# Altium PCB mainboard.PcbDoc
Units mil, origin at the board's own origin, x right, y up, seen from the top; angles counter-clockwise.
Board outline 2960 x 2965 mil, 2 copper layers (Top Layer, Bottom Layer); 49 components, 42 nets, 204 pads, 127 vias.
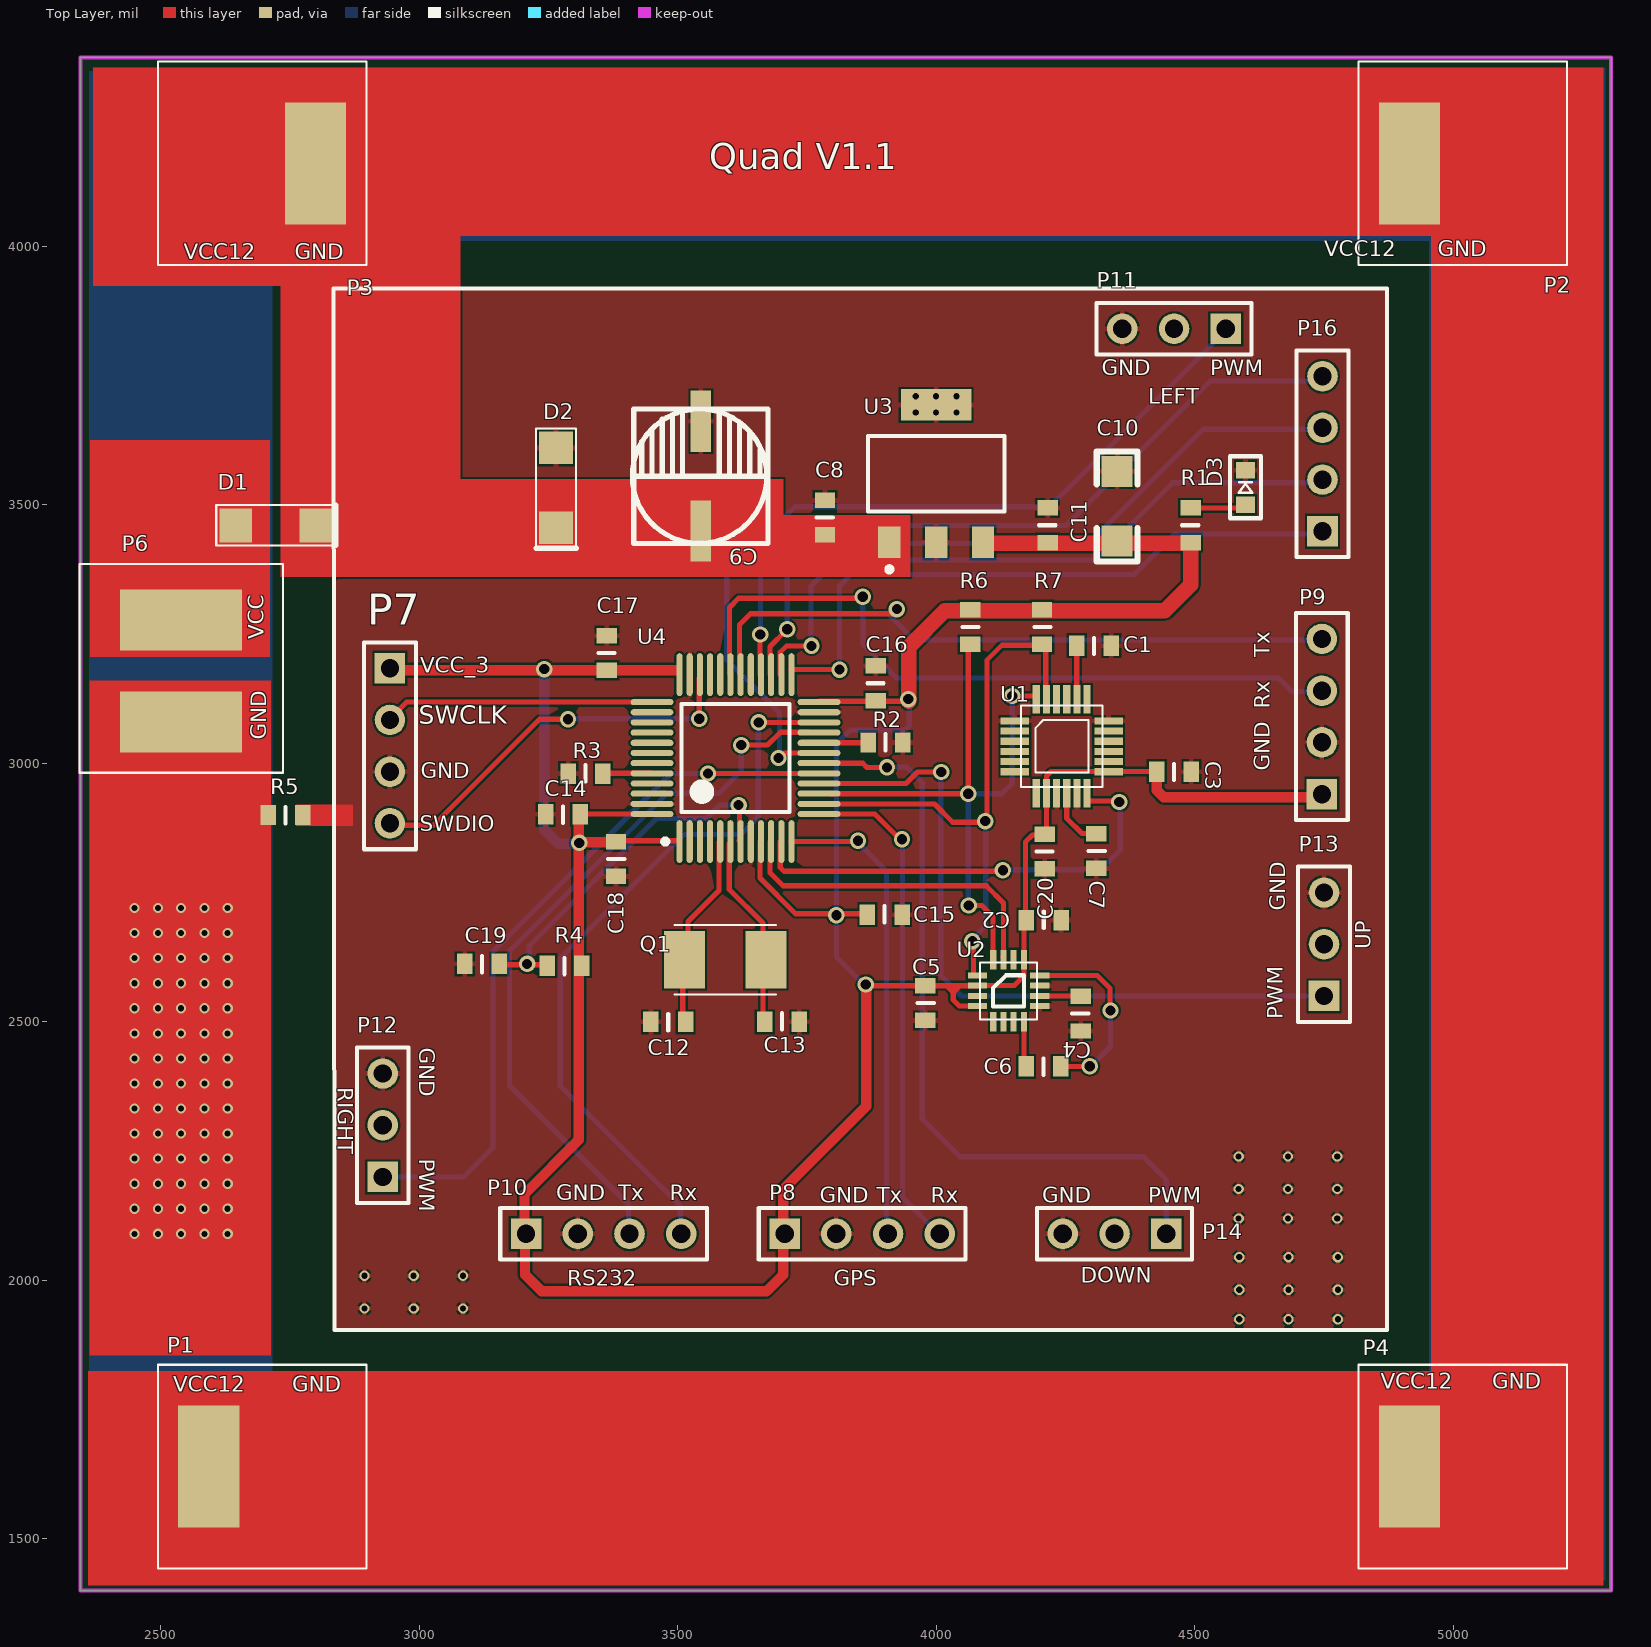
[diagram p0: Top Layer view]
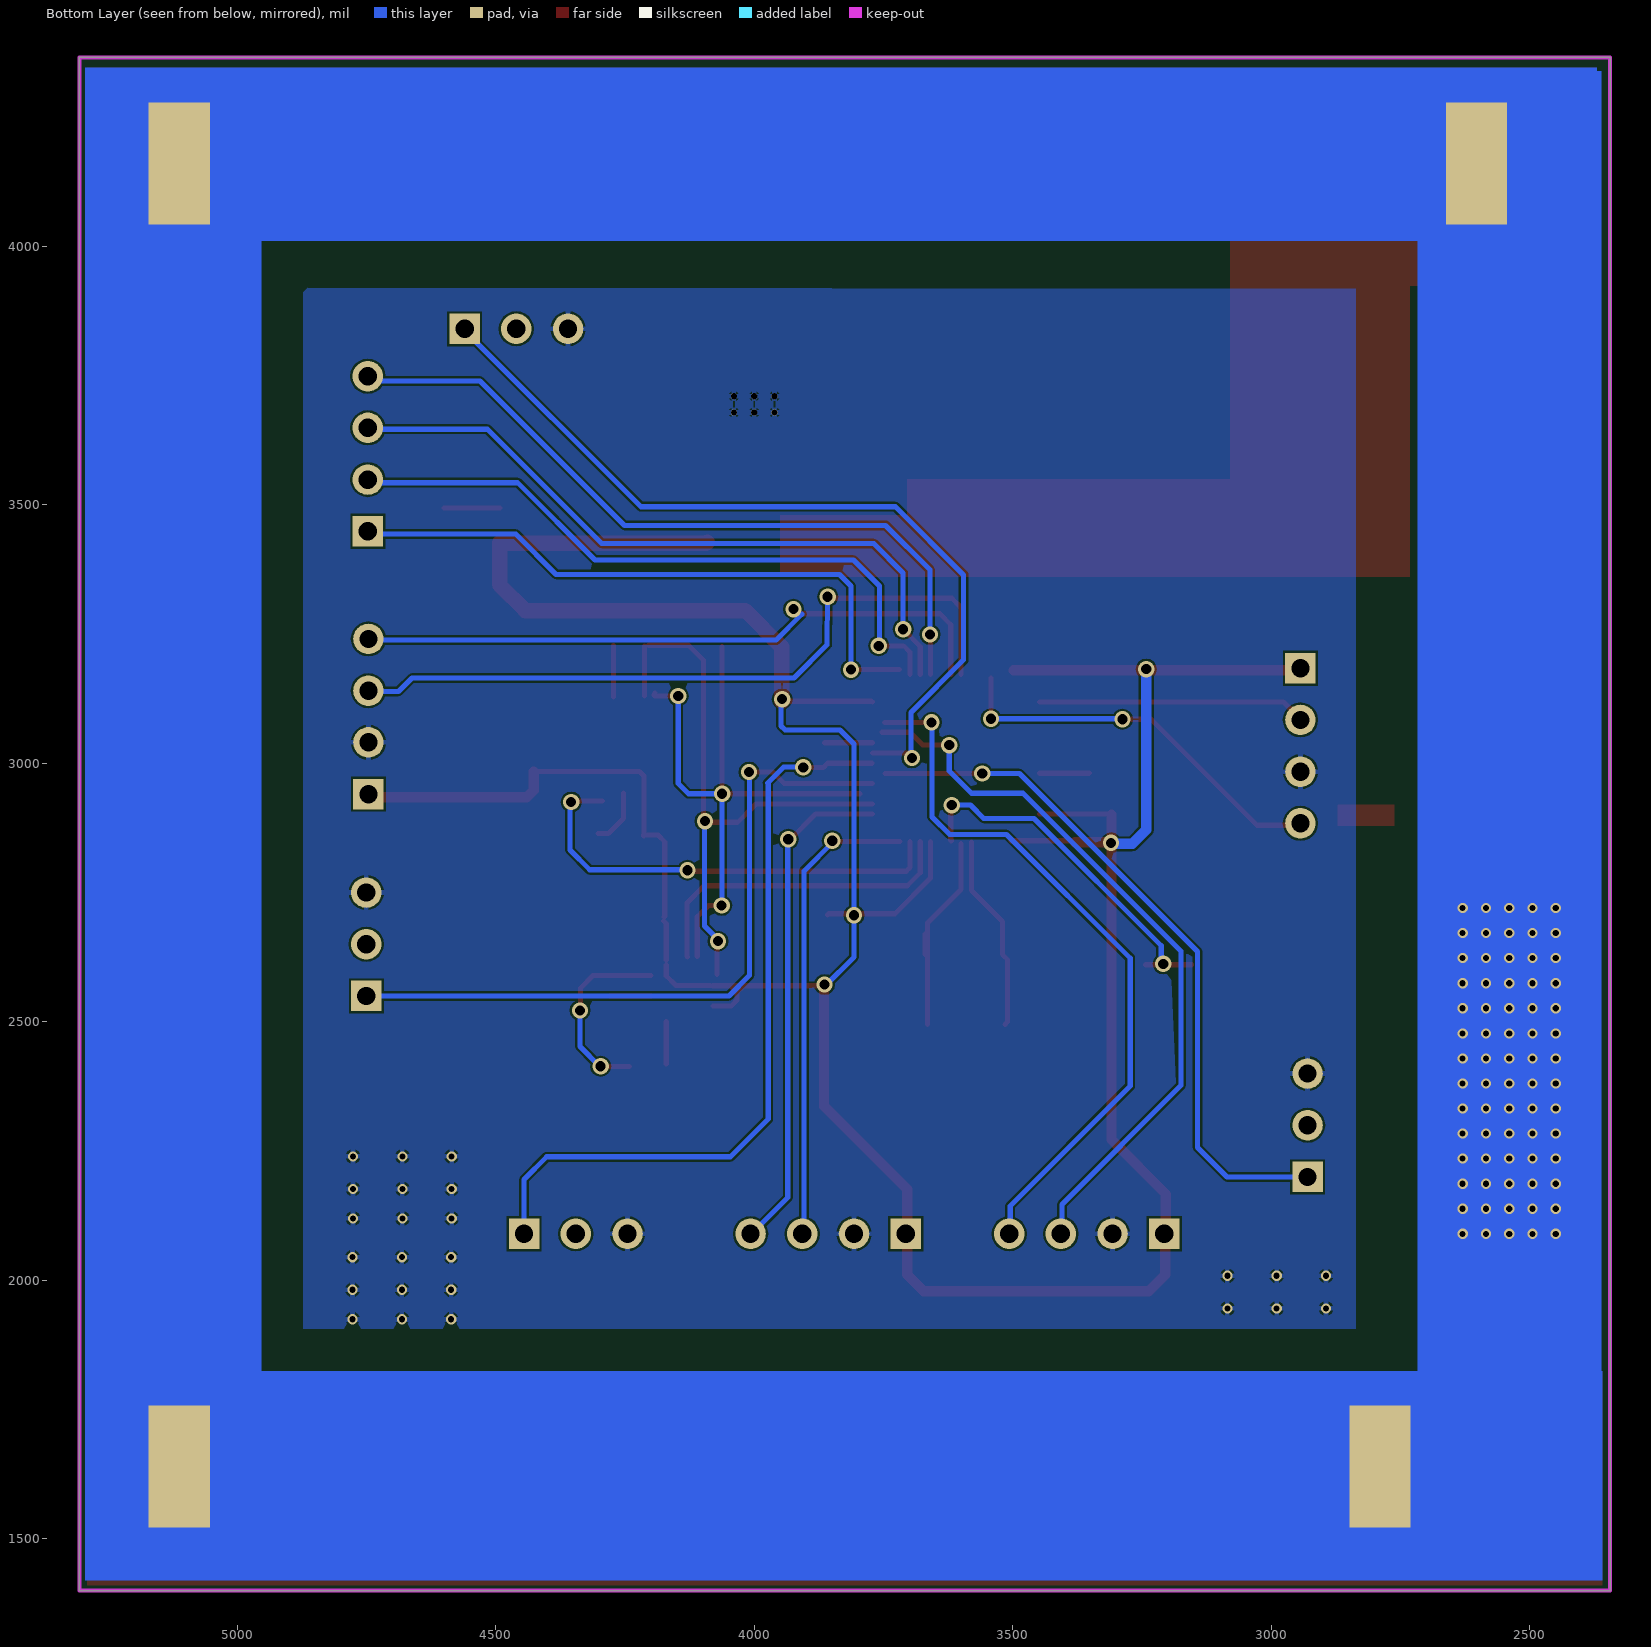
[diagram p1: Bottom Layer view, seen from below]

## Layer stack, top to bottom
Top Layer: signal copper 1.4
Dielectric: dielectric 12.6, FR-4, Dk 4.8
Bottom Layer: signal copper 1.4

## Board outline
2345,4365 5305,4365 5305,1400 2345,1400

## Design rules (kind name [scope] priority, off if disabled: settings)
Clearance [All] p1: gap=4
ComponentClearance [All] p1: gap=10 collisioncheckmode=3 verticalgap=10
PolygonConnect [All] p1: connectstyle=Relief reliefconductorwidth=10 reliefentries=4 polygonreliefangle="90 Angle"
RoutingVias [All] p1: holewidth=6 width=10 viastyle="Through Hole" minholewidth=5 minwidth=5 maxholewidth=50 maxwidth=100
SolderMaskExpansion [All] p1: expansion=4
TestPointUsage [All] p1: valid=0 allowmultiple=FALSE
Testpoint [All] p1: side=15 testpointundercomponent=TRUE minsize=40 maxsize=100 preferedsize=60 minholesize=0 maxholesize=40 preferedholesize=32 testpointgrid=1 style=1023 order=0123456789
Width [All] p1: maxlimit=100 minlimit=10 preferedwidth=10
18 further rules are at their usual default settings.

## Classes and differential pairs
component class mainboard: C1 C2 C3 C4 C5 C6 C7 C20 P1 P2 P3 P4 P11 P12 P13 P14 R6 R7 U1 U2
component class STM32: C12 C13 C14 C15 C16 C17 C18 C19 C? P7 P8 P9 P10 P16 Q1 R2 R3 R4 R5 U4
component class power: "12V switch" C8 C9 C10 C11 D1 D2 D3 P5 P6 P? R1 U3

## Components (designator, comment, footprint, x,y, rotation, side; value= is the part's Value field where it differs from the comment)
C1 "Cap" 0603 4305.33,3227.49 r0 top
C2 "Cap" 0603 4207.98,2696.71 r180 top
C3 "Cap" 0603 4460.02,2983.79 r0 top
C4 "Cap" 0603 4279.5,2515.68 r270 top
C5 "Cap" 0603 3979.15,2536.12 r90 top
C6 "Cap" 0603 4207.49,2413.71 r0 top
C7 "Cap" 0603 4309.87,2829.99 r90 top
C8 "100nF" 0603 3785,3475 r270 top
C9 "10uF" CAP_6.3_5.8 3545,3555 r180 top
C10 "10uF 10-35V" 1206 4350.05,3429.55 r90 top
C11 "100nF" 0603 4215.72,3460.21 r270 top
C12 "1pF" 0603 3482,2500 r0 top
C13 "1pF" 0603 3702,2500 r180 top
C14 "Cap" 0603 3278.16,2901.13 r0 top
C15 "Cap" 0603 3900.5,2707.05 r180 top
C16 "Cap" 0603 3883.43,3154.71 r270 top
C17 "Cap" 0603 3363.14,3213.37 r270 top
C18 "Cap" 0603 3380.78,2814.5 r90 top
C19 "Cap" 0603 3121.89,2612.15 r0 top
C20 "Cap" 0603 4210.13,2828.97 r270 top
D1 "ES3B" DO-214AC 2800,3460 r180 top
D2 "TVS" DO-214AC 3265,3455 r90 top
D3 "LED1" LED0603 4598.2,3533.72 r90 top
P1 "Header 2" "motor connect" 2593.43,1640 r0 top
P2 "Header 2" "motor connect" 4915,4160 r0 top
P3 "Header 2" "motor connect" 2800,4160 r180 top
P4 "Header 2" "motor connect" 4915,1640 r0 top
P6 "Header 2" KL 2540,3080 r90 top
P7 "DownLoad" HDR1X4 2943.74,3183.72 r270 top
P8 "GPS" HDR1X4 3707,2090 r0 top
P9 "BlueTooth" HDR1X4 4745.93,2940.32 r90 top
P10 "RS232" HDR1X4 3207,2090 r0 top
P11 "Header 3" HDR1X3 4560,3840 r180 top
P12 "Header 3" HDR1X3 2930,2200 r90 top
P13 "Header 3" HDR1X3 4750,2550 r90 top
P14 "Header 3" HDR1X3 4445,2090 r180 top
P16 "Pin_test" HDR1X4 4747.08,3448.49 r90 top
Q1 "XTAL" xtal-5032 3592,2620 r270 top
R1 "Res2" 0603 4492.18,3460.22 r270 top
R2 "Res2" 0603 3902,3040 r180 top
R3 "Res2" 0603 3322,2980 r180 top
R4 "Res2" 0603 3281.59,2608.44 r0 top
R5 "Res2" 0603 2742,2900 r0 top
R6 "Res2" 0603 4065.71,3263.24 r90 top
R7 "Res2" 0603 4204.76,3263.24 r90 top
U1 "MPU-6050" MPU-6050 4164,2954 r0 top locked
U2 "HMC5883" HMC5883L 4140,2560 r0 top
U3 "LDO" SOT-223 4000,3560 r0 top
U4 "STM32F103C8T6ATR" LQFP48_M 3612,3010 r90 top

## Footprints (in the part's own frame and the unit in brackets; to place one, negate y for a bottom-side part, rotate by r counter-clockwise, add the part's x,y. Pads: shape width x height; smd on the part's side, far side on the other; paste and mask are expansions set on the pad)
0603 [mm] "Chip Capacitor; Body 1.6 x 0.8 mm (LxW typ)"
  rect 0.76x1 smd: 1(-0.85,0) 2(0.85,0)
  silkscreen extent 0,-0.42 0,0.38
1206 [mil]
  rect 60x60 smd: 1(0,0) 2(135,0)
  silkscreen extent -39,-39 173,39
CAP_6.3_5.8 [mm]
  rect 1x3 smd: 1(0,2.7) 2(0,-2.7)
  silkscreen extent -3.3,-3.3 3.36,3.3
DO-214AC [mm]
  rect 1.6x1.67 smd: 1(3.93,0) 2(0,0)
  silkscreen extent -1,-1 4.88,0.99
HDR1X3 [mm] "Connector; Header; 3 Position"
  rect 1.5x1.5 hole 0.9: 1(0,0)
  round 1.5 hole 0.9: 2(2.54,0) 3(5.08,0)
  silkscreen extent -1.27,-1.27 6.35,1.27
HDR1X4 [mm]
  rect 1.5x1.5 hole 0.9: 1(0,0)
  round 1.5 hole 0.9: 2(2.54,0) 3(5.08,0) 4(7.62,0)
  silkscreen extent -1.27,-1.27 8.89,1.27
HMC5883L [mm]
  rect 0.95x0.3 smd: 1(-1.525,0.75) 2(-1.525,0.25) 3(-1.525,-0.25) 4(-1.525,-0.75) 9(1.525,-0.75) 10(1.525,-0.25) 11(1.525,0.25) 12(1.525,0.75)
  round 0.3 on Top Overlay: 2(-1.651,1.27)
  rect 0.3x0.95 smd: 5(-0.75,-1.525) 6(-0.25,-1.525) 7(0.25,-1.525) 8(0.75,-1.525) 13(0.75,1.525) 14(0.25,1.525) 15(-0.25,1.525) 16(-0.75,1.525)
  silkscreen extent -1.4,-1.4 1.4,1.4
KL [mm]
  rect 3x6 smd: 1(0,0) 2(5,0)
  silkscreen extent -2.5,-5 7.75,5
LED0603 [mil] "LED0603"
  rect 32x36 smd: 1(-34,0) 2(33,0)
  silkscreen extent -60,-30 60,30
LQFP48_M [mm] "Thin QFP, 48-Leads, Body 7x7mm, Pitch 0.5mm, IPC Low Density"
  oval 2.1x0.3 smd: 1(-4.1,2.75) 2(-4.1,2.25) 3(-4.1,1.75) 4(-4.1,1.25) 5(-4.1,0.75) 6(-4.1,0.25) 7(-4.1,-0.25) 8(-4.1,-0.75) 9(-4.1,-1.25) 10(-4.1,-1.75) 11(-4.1,-2.25) 12(-4.1,-2.75) 25(4.1,-2.75) 26(4.1,-2.25) 27(4.1,-1.75) 28(4.1,-1.25) 29(4.1,-0.75) 30(4.1,-0.25) 31(4.1,0.25) 32(4.1,0.75) 33(4.1,1.25) 34(4.1,1.75) 35(4.1,2.25) 36(4.1,2.75)
  oval 0.3x2.1 smd: 13(-2.75,-4.1) 14(-2.25,-4.1) 15(-1.75,-4.1) 16(-1.25,-4.1) 17(-0.75,-4.1) 18(-0.25,-4.1) 19(0.25,-4.1) 20(0.75,-4.1) 21(1.25,-4.1) 22(1.75,-4.1) 23(2.25,-4.1) 24(2.75,-4.1) 37(2.75,4.1) 38(2.25,4.1) 39(1.75,4.1) 40(1.25,4.1) 41(0.75,4.1) 42(0.25,4.1) 43(-0.25,4.1) 44(-0.75,4.1) 45(-1.25,4.1) 46(-1.75,4.1) 47(-2.25,4.1) 48(-2.75,4.1)
  silkscreen extent -4.22,-2.65 2.65,3.57, body extent -3.5,-3.5 3.5,3.5, height 1.6
"motor connect" [mm]
  rect 3x6 smd: 1(0,0)
  rect 3x6 smd far side: 2(5,0)
  silkscreen extent -2.5,-5 7.75,5
MPU-6050 [mm]
  rect 1.4x0.35 smd: 1(-0.3,3.25) 2(-0.3,2.75) 3(-0.3,2.25) 4(-0.3,1.75) 5(-0.3,1.25) 6(-0.3,0.75) 13(4.3,0.75) 14(4.3,1.25) 15(4.3,1.75) 16(4.3,2.25) 17(4.3,2.75) 18(4.3,3.25)
  round 0.3 on Top Overlay: 2(-0.655,3.837)
  rect 0.35x1.4 smd: 7(0.75,-0.3) 8(1.25,-0.3) 9(1.75,-0.3) 10(2.25,-0.3) 11(2.75,-0.3) 12(3.25,-0.3) 19(3.25,4.3) 20(2.75,4.3) 21(2.25,4.3) 22(1.75,4.3) 23(1.25,4.3) 24(0.75,4.3)
  silkscreen extent 0,0 4,4
SOT-223 [mm]
  rect 1.1x1.55 smd: 1(-2.3,-3.375) 2(0,-3.375) 3(2.3,-3.375)
  round 0.3 hole 0.3: 4(-1,3.8) 4(-1,3) 4(0,3) 4(0,3.8) 4(1,3) 4(1,3.8)
  rect 3.45x1.55 smd: 4(0,3.375)
  silkscreen extent -3.35,-4.82 3.35,1.85
xtal-5032 [mm]
  rect 2.8x2 smd: 1(0,-2) 2(0,2)
  silkscreen extent -1.7,-2.5 1.7,2.5

## Part data
C1 C2 C3 C4 C5 C6 C7 C14 C15 C16 C17 C18 C19 C20: "Capacitor"
C8 C11 C12 C13: library part "Cap Semi", "Capacitor (Semiconductor SIM Model)"
C9 C10: library part "Cap Pol3", "Polarized Capacitor (Surface Mount)"
D1: library part Diode, "Default Diode"
D2: library part "D Zener", "Zener Diode"
D3: "Typical RED GaAs LED"
P1 P2 P3 P4 P7 P8 P9 P10 P16: library part "Header 4", "Header, 4-Pin"
P6: "Header, 2-Pin"
P11 P12 P13 P14: "Header, 3-Pin"
Q1: "Crystal Oscillator"
R1 R2 R3 R4 R5 R6 R7: "Resistor"

## Via types
v1: diameter 19.68, hole 11.81, Top Layer to Bottom Layer, 95 vias
v2: diameter 31.5, hole 19.68, Top Layer to Bottom Layer, 32 vias

## Nets (pads, with @x,y where several pads share a name; then routed paths per layer and width w, separated by ;. In a path a pad name is that pad's centre, name@x,y a point inside that pad or via, vN(x,y) a via of type N, cw(c..) or ccw(c..) an arc to the next point about the centre after c; other vN are vias at no path point)
6050_INT: U1.12 U4.11 | length 879.4
  Top Layer w10: U4.11@3698.58,2848.58 3698.58,2798.42 3706,2791 v2@4132,2791 ; U1.12@4294,2927 v2@4351,2927
  Bottom Layer w10: v2@4128,2794 4318,2794 4356,2832 v2@4356,2924
  other v2: 4129,2793 4354,2925
AGND: P1.2 P2.2 P3.2 P4.2 P6.1 R5.1
  other v1: 2450,2090 2495,2090 2540,2090 2585,2090 2630,2090 2450,2138.46 2495,2138.46 2540,2138.46 2585,2138.46 2630,2138.46 2450,2186.92 2495,2186.92 2540,2186.92 2585,2186.92 2630,2186.92 2450,2235.38 2495,2235.38 2540,2235.38 2585,2235.38 2630,2235.38 2450,2283.85 2495,2283.85 2540,2283.85 2585,2283.85 2630,2283.85 2450,2332.31 2495,2332.31 2540,2332.31 2585,2332.31 2630,2332.31 2450,2380.77 2495,2380.77 2540,2380.77 2585,2380.77 2630,2380.77 2450,2429.23 2495,2429.23 2540,2429.23 2585,2429.23 2630,2429.23 2450,2477.69 2495,2477.69 2540,2477.69 2585,2477.69 2630,2477.69 2450,2526.15 2495,2526.15 2540,2526.15 2585,2526.15 2630,2526.15 2450,2574.61 2495,2574.61 2540,2574.61 2585,2574.61 2630,2574.61 2450,2623.08 2495,2623.08 2540,2623.08 2585,2623.08 2630,2623.08 2450,2671.54 2495,2671.54 2540,2671.54 2585,2671.54 2630,2671.54 2450,2720 2495,2720 2495,2720 2540,2720 2585,2720 2630,2720
AUX_CL: U1.7
AUX_DA: U1.6
BLUETOOTH_RXD: P9.3 U4.31 | length 1414.3
  Top Layer w10: U4.31@3600.16,3171.42 3600.16,3301.16 3618,3319 3856,3319 v2@3861,3324
  Bottom Layer w10: v2(3858,3322) 3859,3229 3923,3165 4662,3165 4688,3139 P9.3@4743,3139
BLUETOOTH_TXD: P9.4 U4.30 | length 1270.2
  Top Layer w10: U4.30@3619.84,3171.42 3619.84,3267.84 3641,3289 3914,3289 v2@3924,3299
  Bottom Layer w10: 3908,3288 3958,3238 P9.4@4744,3238
  other v2: 3924,3298
CONTROL_DOWN: P16.1 U4.25 | length 1222.4
  Top Layer w10: U4.25@3719,3181 v2(3813,3181)
  Bottom Layer w10: v2(3813,3181) 3813,3343 3835,3365 4383,3365 4461,3443 P16.1@4738,3443
CONTROL_LEFT: P16.3 U4.27 | length 1344.6
  Top Layer w10: U4.27@3678.9,3171.42 3678.9,3225.9 3710,3257 v2@3712,3257
  Bottom Layer w10: v2(3712,3259) 3712,3368 3769,3425 4295,3425 4516,3646 P16.3@4732,3646
CONTROL_RIGHT: P16.4 U4.28 | length 1427
  Top Layer w10: U4.28@3659.21,3171.42 v2@3659.21,3247.21
  Bottom Layer w10: v2(3660,3249) 3660,3374 3746,3460 4251,3460 4530,3739 P16.4@4735,3739
CONTROL_UP: P16.2 U4.26 | length 1291.6
  Top Layer w10: U4.26@3698.58,3171.42 3698.58,3214.58 3711,3227 v2@3757,3227
  Bottom Layer w10: v2@3758,3222 3758,3343 3808,3393 4308,3393 4457.42,3542.42 P16.2@4739.3,3542.42
  other v2: 3759,3227
DRDY: U2.15 U4.10 | length 641.1
  Top Layer w10: U4.10@3678.9,2848.58 3678.9,2788.1 3704,2763 4097,2763 4130,2730 4130,2626 U2.15@4129,2625
EXTAL: C12.2 Q1.1 U4.5 | length 377
  Top Layer w10: Q1.1@3510,2620 3510,2500 C12.2@3515,2495 ; Q1.1@3515,2625 3520,2630 3520,2694 3580,2754 U4.5@3580,2848
GND: C1.2 C2.1 C3.2 C4.2 C5.1 C7.1 C8.1 C9.2 C10.2 C11.1 C12.1 C13.1 C14.1 C15.1 C16.1 C17.1 C18.1 C19.1 C20.2 D2.1 D3.2 P7.3 P8.2 P9.2 P10.2 P11.3 P12.3 P13.3 P14.3 R2.1 R3.2 R5.2 U1.1 U1.9 U1.11 U1.18 U2.9 U2.11 U3.2 U3.4 U4.8 U4.23 U4.35 U4.47
  other v1: 4586,1924.85 4681.33,1924.85 4776.67,1924.85 2894.33,1945.85 2989.67,1945.85 3085,1945.85 4586,1981.85 4681.33,1981.85 4776.67,1981.85 2894.33,2008.85 2989.67,2008.85 3085,2008.85 4586,2044.85 4681.33,2044.85 4776.67,2044.85 4585,2119.85 4680.33,2119.85 4775.67,2119.85 4585,2176.85 4680.33,2176.85 4775.67,2176.85 4585,2239.85 4680.33,2239.85 4775.67,2239.85
GPS_RXD: P8.4 U4.13 | length 978.2
  Top Layer w10: U4.13@3771.42,2901.73 3881.27,2901.73 v2@3931,2852 ; P8.4@4000,2095 P8.4@4005,2090
  Bottom Layer w10: v2@3935,2852 3935,2160 P8.4@4005,2090
  other v2: 3934,2853
GPS_TXD: P8.3 U4.12 | length 916.8
  Top Layer w10: U4.12@3718.27,2848.58 v2@3852,2848.58
  Bottom Layer w10: v2@3846,2849 3904,2791 P8.3@3904,2090
  other v2: 3849,2850
IIC_SCL: R7.1 U1.23 U2.1 U4.14 | length 1176.9
  Top Layer w10: U4.14@3771.42,2921.42 3996.58,2921.42 4032,2886 v2@4094,2886 ; U2.1@4072,2591.49 v2@4072,2656 ; v2@4098,2888 4098,3199 4127,3228 R7.1@4204,3228 ; U1.23@4212,3130 R7.1@4212,3227
  Bottom Layer w10: v2@4075,2661 v2(4070,2656) 4070,2659 4096,2685 4096,2883 v2@4093,2886
  other v2: 4095,2888
IIC_SDA: R6.1 U1.24 U2.16 U4.15 | length 1208.6
  Top Layer w10: U4.15@3796,2941 v2(4062,2941) v2@4063,2941 ; v2@4062,2942 R6.1@4062,3226 ; v2(4063,2725) 4088,2725 4110,2703 U2.16@4110,2626 ; v2(4147,3130) 4192,3130 U1.24@4194,3132 ; U1.24@4192,3136 U1.24@4193,3135
  Bottom Layer w10: v2@4062,2729 v2(4062,2941) 4127,2941 4147,2961 v2(4147,3130) v2@4147,3131
NetC1_1: C1.1 U1.20 | length 99.5
  Top Layer w10: C1.1 4272,3227.36 U1.20@4272,3128
NetC4_1: C4.1 U2.10 | length 79.8
  Top Layer w10: U2.10 C4.1@4279.84,2550.16
NetC6_1: C6.1 U2.8 | length 81
  Top Layer w10: C6.1@4170,2419 U2.8@4170,2500
NetC6_2: C6.2 U2.12 | length 365
  Top Layer w10: U2.12 4311.47,2589.53 4336,2565 v2@4336,2525 ; C6.2 4295.71,2413.71 v2@4296,2414
  Bottom Layer w10: v2@4299,2414 4337,2452 v2(4337,2522)
  other v2: 4297,2414
NetC7_2: C7.2 U1.10 | length 110.4
  Top Layer w10: U1.10 4252.58,2893.42 4282,2864 C7.2@4302,2864
NetD3_1: D3.1 R1.1 | length 107.8
  Top Layer w10: R1.1 D3.1@4600,3493.69
NetR2_2: R2.2 U4.20 | length 92.8
  Top Layer w10: U4.20@3771.42,3039.53 3863.53,3039.53 R2.2@3864,3040
NetR3_1: R3.1 U4.44 | length 96.8
  Top Layer w10: R3.1@3352,2981 3352.53,2980.47 U4.44@3448.58,2980.47
NRST: C19.2 R4.1 U4.7 | length 713.5
  Top Layer w10: C19.2@3155,2610.24 R4.1@3243.57,2610.24 ; v2(3618,2919) 3620,2917 3620,2851 U4.7@3619,2850
  Bottom Layer w10: v2@3213,2610 3213,2647 3459,2893 3556,2893 3582,2919 v2(3618,2919)
  other v2: 3209,2612
PWM_DOWN: P14.1 U4.18 | length 1492.1
  Top Layer w10: U4.18@3772,3000 3858,3000 3866,2992 v2(3905,2992) ; P14.1@4440,2090 P14.1@4445,2095
  Bottom Layer w10: v2@3914,2993 3943,2993 3974,2962 3973,2961 3973,2312 4046,2239 4401,2239 4445,2195 P14.1
PWM_LEFT: P11.1 U4.19 | length 1644.7
  Top Layer w10: v2@3696,3010 3705.84,3019.84 U4.19@3771.42,3019.84
  Bottom Layer w10: v2@3697,3006 3697,3098 3595,3200 3595,3364 3727,3496 4219,3496 4560,3837 P11.1 P11.1@4560,3841
  other v2: 3695,3010
PWM_RIGHT: P12.1 U4.17 | length 1369.1
  Top Layer w10: v2(3559,2980) U4.17@3747,2980
  Bottom Layer w10: P12.1 3086,2200 3143,2257 3143,2636 3487,2980 v2(3559,2980) v2@3566,2980
PWM_UP: P13.1 U4.16 | length 1396.4
  Top Layer w10: U4.16@3771.42,2960.79 3941.79,2960.79 3964,2983 v2@4009,2983
  Bottom Layer w10: v2@4009,2982 4009,2590 4049,2550 P13.1
  other v2: 4010,2983
RS232_RXD: P10.4 U4.22 | length 1403.2
  Top Layer w10: P10.4@3500,2095 P10.4@3505,2100 ; v2(3657,3079) U4.22@3748,3079
  Bottom Layer w10: P10.4@3505,2090 3505,2144 3273,2376 3273,2623 3512,2862 3622,2862 3656,2896 v2@3656,3076
RS232_TXD: P10.3 U4.21 | length 1430.8
  Top Layer w10: P10.3@3400,2085 P10.3@3405,2090 ; v2(3623,3035) 3674,3035 3699,3060 U4.21@3753,3060
  Bottom Layer w10: P10.3@3405,2090 3405,2147 3175,2377 3175,2637 3480,2942 3580,2942 3623,2985 v2@3623,3034
RX: U4.43
SWCLK: P7.2 U4.37 | length 520.8
  Top Layer w10: P7.2@2942,3084 2976.27,3118.27 U4.37@3448.58,3118.27
SWDIO: P7.4 U4.34 | length 760.9
  Top Layer w10: P7.4@2946,2880 3028,2880 3233,3085 v2(3288,3085) ; v2(3542,3086) U4.34@3542,3165
  Bottom Layer w10: v2@3287,3086 v2(3542,3086)
TX: U4.42
USB+: U4.33
USB-: U4.32
VCC12: C8.2 C9.1 D1.2 D2.2 P1.1 P2.1 P3.1 P4.1 U3.1
VCC_3: C2.2 C3.1 C5.2 C10.1 C11.2 C14.2 C15.2 C16.2 C17.2 C18.2 C20.1 P7.1 P8.1 P9.1 P10.1 R1.2 R4.2 R6.2 R7.2 U1.8 U1.13 U2.2@4079.96,2569.84 U2.4 U2.13 U3.3 U4.1 U4.9 U4.24 U4.36 U4.48 | length 7095.9
  Top Layer w10: C14.2@3308,2902 3308.27,2901.73 U4.48@3448.58,2901.73 ; C18.2@3380,2850 U4.1@3503,2850 ; U4.9@3659.21,2848.58 3659.21,2777.79 3728,2709 3856,2709 C15.2@3858,2707 ; U4.24@3771.42,3118.27 3773.15,3120 v2@3947,3120 ; v2@3866,2569.84 U2.2@4079.96,2569.84 ; 4033,2569 4033,2542 4044.53,2530.47 U2.4 ; U2.2@4085,2570 4151,2570 4170,2589 U2.13@4170,2610 ; U2.13@4170,2620 4170,2690 C2.2@4175,2695 ; C2.2@4174,2703 4173,2704 4173,2848 4186,2861 C20.1@4214,2861 ; C20.1@4214,2859 4213.21,2859.79 4213.21,2975.21 4222,2984 C3.1@4426,2984 ; C3.1@4420,2982 C3.1@4423,2983
  Top Layer w20: P7.1@2940,3180 U4.36@3498,3180 ; P10.1@3204,2092 3204,2167 3309.03,2272.03 C14.2@3309.03,2901 ; P10.1@3205,2090 3205,2011 3237,1979 3672,1979 3704,2011 3704,2176 3865,2337 v2@3865,2575 ; v2@3312,2847 C18.2@3379.38,2847 ; C3.1 4426.56,2947.44 4440,2934 4739,2934 P9.1@4745,2940
  Top Layer w30: v2@3947,3120 3947,3225 4017,3295 4442.36,3295 4492.18,3344.82 R1.2 ; U3.3 4092.68,3425 R1.2@4490,3425
  Bottom Layer w10: v2@3862,2570 3807,2625 v2(3807,2706) 3807,3037 3834,3064 3940,3064 3948,3072 v2@3948,3125
  Bottom Layer w20: v2(3242,3182) 3242,2871 3269,2844 v2@3309,2844
  other v2: 3864,2572 3310,2846 3946,3124
VCCIN: D1.1 P6.2
XTAL: C13.2 Q1.2 U4.6 | length 416.9
  Top Layer w10: U4.6@3600,2845 3600,2756 3665,2691 C13.2@3665,2495 ; Q1.2@3670,2630 Q1.2@3670,2670
pads on no net: P11.2 P12.2 P13.2 P14.2 U1.2 U1.3 U1.4 U1.5 U1.14 U1.15 U1.16 U1.17 U1.19 U1.21 U1.22 U2.2@4075,2610 U2.3 U2.5 U2.6 U2.7 U2.14 U4.2 U4.3 U4.4 U4.29 U4.38 U4.39 U4.40 U4.41 U4.45 U4.46

## Polygon pours and split planes (outlines as drawn)
GND on Top Layer "TOPGND" (solid, remove dead copper, pour order 1000): 2835.67,1902 4869.67,1902 4869.67,3914 4868.67,3915 2833.67,3915
GND on Bottom Layer "BOTTOMGND" (solid, remove dead copper, pour order 1001): 2837,3918 2837,1906 2836,1905 2837,1906 4872,1906 4872,3919

## Keep-outs
Keep-Out Layer:
  the board outline again, w7.87

## Other copper
Top Layer:
  rectangle net VCC12: 2370,4020 5275,4345
  rectangle net VCCIN: 2364,3205 2712,3625
  rectangle net VCC12: 2732,3360 3080,4340
  rectangle net VCC12: 2370,3923 2739,4035
  rectangle net VCC12: 3005,3360 3705,3550
  rectangle net VCC12: 3645,3360 3950,3480
  rectangle net VCC12: 4957,1415 5290,4345
  rectangle net VCC12: 2360,1410 5290,1825
  rectangle net AGND: 2363,1855 2714,3160
  region net VCC_3: 4029.5,2553.5 4035.86,2559.86 4023.36,2572.36 4017,2566
  region net VCC_3: 4049,2566 4042.64,2572.36 4030.14,2559.86 4036.5,2553.5
  rectangle net GND: 2762,2879 2872,2920
Bottom Layer:
  rectangle net AGND: 2360,1420 5290,1825
  rectangle net AGND: 4953,1420 5294,4345
  rectangle net AGND: 2370,4010 5285,4345
  rectangle net AGND: 2362,1420 2717,4339

## Silkscreen, mask and mechanical layers (free items; w line width, h text height)
Top Overlay:
  lines w7.87: 2834.42,3918 4872,3918 4872,1904 2836.25,1904 2834.42,3918
  text "Quad V1.1" at 3561,4149 h50
  text "VCC12" at 4750,3980 h30
  text "GND" at 4970,3980 h30
  text "VCC12" at 2545,3975 h30
  text "GND" at 2760,3975 h30
  text "GND" at 4320,3750 h30
  text "PWM" at 4530,3750 h30
  text "LEFT" at 4410,3695 h30
  text "VCC" at 2700,3240 h30 r90
  text "Tx" at 4645,3205 h30 r90
  text "VCC_3" at 3002,3175 h30
  text "Rx" at 4645,3105 h30 r90
  text "SWCLK" at 2999,3065 h60
  text "GND" at 2705,3045 h30 r90
  text "GND" at 4645,2985 h30 r90
  text "GND" at 3003,2971 h30
  text "SWDIO" at 3001,2868 h30
  text "GND" at 4675,2715 h30 r90
  text "UP" at 4840,2640 h30 r90
  text "PWM" at 4670,2505 h30 r90
  text "GND" at 3000,2450 h30 r270
  text "RIGHT" at 2843,2373 h30 r270
  text "PWM" at 3000,2235 h30 r270
  text "GND" at 3265,2155 h30
  text "Tx" at 3385,2155 h30
  text "Rx" at 3485,2155 h30
  text "GND" at 3775,2150 h30
  text "Tx" at 3885,2150 h30
  text "Rx" at 3990,2150 h30
  text "GND" at 4205,2150 h30
  text "PWM" at 4410,2150 h30
  text "DOWN" at 4280,1995 h30
  text "VCC12" at 4860,1790 h30
  text "GND" at 5075,1790 h30
  text "VCC12" at 2525,1785 h30
  text "GND" at 2755,1785 h30